# Allegro board LAY-96100_A.brd
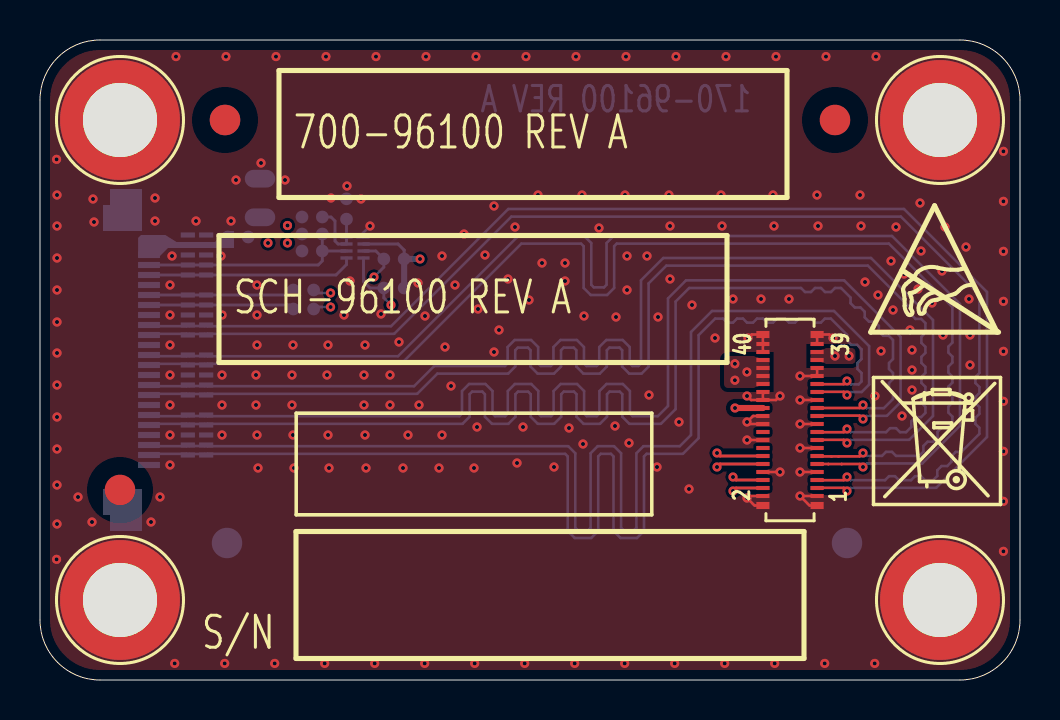
[diagram p0: board, top side]
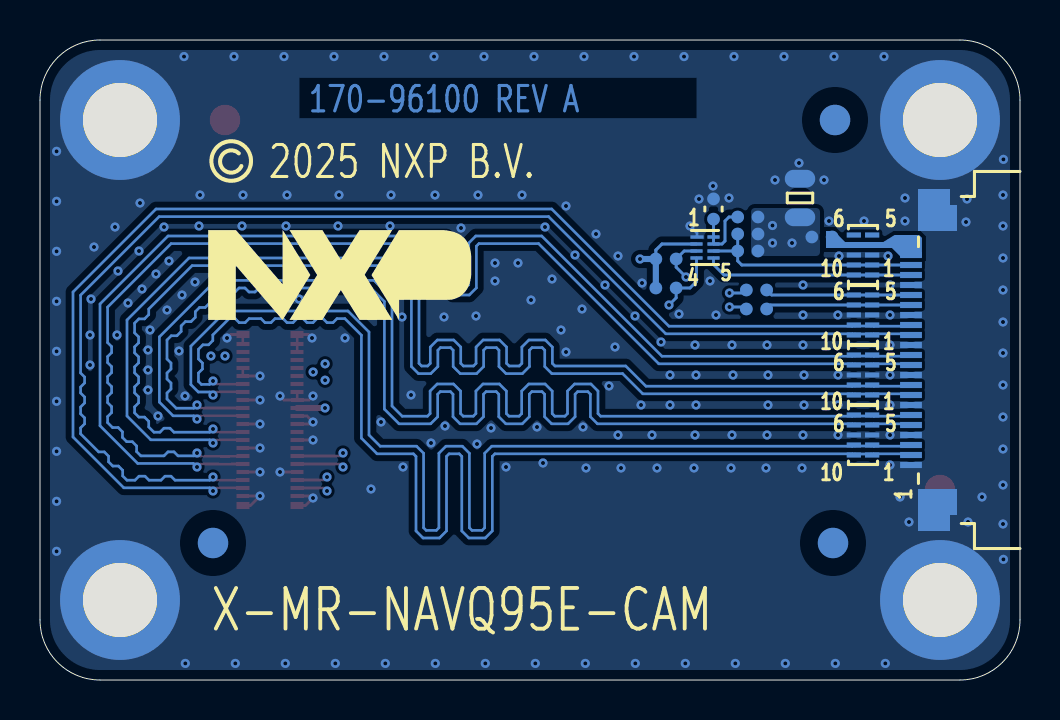
[diagram p1: board, bottom side, seen from below]

Outline 49 x 32 mm; copper layers: TOP, L2_GND1, L3_SIG1, L4_SIG2, L5_GND2, BOTTOM. Coordinates in mm from the lower left corner of the outline.
Outline path: 0,29 arc(0.88,31.12) 3,32 46,32 arc(48.12,31.12) 49,29 49,3 arc(48.12,0.88) 46,0 3,0 arc(0.88,0.88) 0,3 0,29

## Design rules (mm)
constraint set DEFAULT: min track width 0.145
net group MIPI_CSI: nets MIPI_CSI_CLK_N MIPI_CSI_D0_N MIPI_CSI_D1_N MIPI_CSI_D2_N MIPI_CSI_D3_N
net group MIPI_CSI_CLK_: nets MIPI_CSI_CLK_P
net group MIPI_CSI_D0_: nets MIPI_CSI_D0_P
net group MIPI_CSI_D1_: nets MIPI_CSI_D1_P
net group MIPI_CSI_D2_: nets MIPI_CSI_D2_P
net group MIPI_CSI_D3_: nets MIPI_CSI_D3_P
net group POWER: nets VDD_1V8 VDD_CON_3V3 VDD_SYS_3V3 VDD_SYS_5V0

## Placement (name value [footprint] x y rotation side)
BH1  MH3.7_6  [MH236-146P]  4 28 0 top
BH2  MH3.7_6  [MH236-146P]  45 28 0 top
BH3  MH3.7_6  [MH236-146P]  4 4 0 top
BH4  MH3.7_6  [MH236-146P]  45 4 0 top
C5  10uF  [CC0805_OV]  11 24.1 90 bottom
C6  0.1uF  [CC0402_25]  15.32 23.55 90 bottom
D1  IP4292CZ10-TBR  [XSON10_0P5_1P1X2P6MM]  7.85 12.25 0 bottom
D2  IP4292CZ10-TBR  [XSON10_0P5_1P1X2P6MM]  7.85 15.25 0 bottom
D3  IP4292CZ10-TBR  [XSON10_0P5_1P1X2P6MM]  7.85 18.25 0 bottom
D4  IP4292CZ10-TBR  [XSON10_0P5_1P1X2P6MM]  7.85 21.25 0 bottom
J1  CON PLUG 2X20  [CON_2X20_0P4_9P52X1P85_SM]  37.5 13 90 top
J3  CONN FPC/FFC 22  [CON_FFC_22_0P5_SM_RA_87H]  2.45 16 90 bottom
NOREF  -  []  12.8 1.08 0 top
NOREF#2  -  []  34.5 11.64 0 top
NOREF#3  -  [unnamed#2]  4 9.5 0 top
NOREF#4  -  []  6.86 4.9 0 top
NOREF#5  -  []  41.77 11.64 90 top
NOREF#6  -  [unnamed#2]  9.25 28 0 top
NOREF#7  -  []  41.67 8.78 0 top
NOREF#8  -  []  0 28.52 0 top
NOREF#9  -  [unnamed#2]  39.75 28 0 top
NOREF#10  -  []  -5.05 17.68 0 top
NOREF#11  -  []  -409.52 -356.24 0 top
NOREF#12  -  []  15.25 20.95 90 top
NOREF#13  -  []  38.52 8.14 90 top
NOREF#14  -  []  11.95 24.12 0 top
NOREF#15  -  []  159.3 -64.51 0 top
NOREF#16  -  []  0 6.75 0 top
NOREF#17  -  []  8.95 15.88 0 top
NOREF#18  -  []  15.32 21.1 90 top
NOREF#19  -  []  6.86 28.9 0 top
NOREF#20  -  []  -384.25 163.44 0 top
NOREF#21  -  []  33.23 11.64 0 top
NOREF#22  -  []  12.81 8.26 0 top
NOREF#23  -  []  5.45 10.75 90 top
NOREF#24  -  []  47.86 28.9 0 top
NOREF#25  -  []  44.84 0 90 top
NOREF#26  -  []  5.17 24.48 0 top
NOREF#27  -  []  33.23 11.64 0 top
NOREF#28  -  []  5.45 10.75 90 top
NOREF#29  -  []  4.9 8 90 top
NOREF#30  -  []  4.9 24 90 top
NOREF#31  -  []  12.12 -161.3 0 top
NOREF#32  -  []  4.9 8 90 top
NOREF#33  -  []  47.86 4.9 0 top
NOREF#34  -  []  33.7 11.64 0 top
NOREF#35  -  []  0 6.75 90 top
NOREF#36  -  []  15.25 20.95 0 top
NOREF#37  -  []  36.48 17.86 0 top
NOREF#38  -  []  12.81 8.26 0 top
NOREF#39  -  []  15.32 22.15 0 top
NOREF#40  -  []  4 4 0 top
NOREF#41  -  []  15.32 21.1 0 top
NOREF#42  -  []  39.44 25.92 180 bottom
NOREF#43  -  [unnamed#2]  9.35 6.85 180 bottom
NOREF#44  -  []  40.58 18 180 bottom
NOREF#45  -  [unnamed#2]  40.35 6.85 180 bottom
NOREF#46  -  [unnamed#2]  9.25 28 180 bottom
R5  200K  [RC0402_25]  13.61 23.15 0 bottom
R8  0 OHM  [RC0402_25]  9.9 22.15 180 bottom
R9  0 OHM  [RC0402_25]  13.18 19.5 180 bottom
R10  0 OHM  [RC0402_25]  13.18 18.55 180 bottom
R38  2.2K  [RC0402_25]  17.7 21.05 180 bottom
R39  2.2K  [RC0402_25]  17.7 19.6 180 bottom
R40  2.2K  [RC0402_25]  13.61 22.3 0 bottom
R41  2.2K  [RC0402_25]  13.61 21.45 0 bottom
U1  PCA9306JK  [X2SON8_0P35_1X1P35MM]  15.75 21.62 180 bottom

## Library data of the parts
BH1-BH4 = MOUNT_HOLE
C5 C6 = CAP_NP
D1-D4 = PUSB3F96_DFN2510A_10P
J1 = HDR_2X20_4S
J3 = CON22_2SH
R5 R8-R10 R38-R41 = RES
U1 = PCA9306_TSSOP8

## Footprints (pads in the part's own frame, mm; a bottom-side part is the same pattern mirrored in y, then rotated)
CC0402_25
  round 0.635 smd: 1(-0.508,0) 2(0.508,0)
CC0805_OV
  oval 0.889x1.524 smd: 1(-0.965,0) 2(0.965,0)
CON_2X20_0P4_9P52X1P85_SM
  rect 0.203x0.66 smd: 1(-3.8,-1.355) 2(-3.8,1.355) 3(-3.4,-1.355) 4(-3.4,1.355) 5(-3,-1.355) 6(-3,1.355) 7(-2.6,-1.355) 8(-2.6,1.355) 9(-2.2,-1.355) 10(-2.2,1.355) 11(-1.8,-1.355) 12(-1.8,1.355) 13(-1.4,-1.355) 14(-1.4,1.355) 15(-1,-1.355) 16(-1,1.355) 17(-0.6,-1.355) 18(-0.6,1.355) 19(-0.2,-1.355) 20(-0.2,1.355) 21(0.2,-1.355) 22(0.2,1.355) 23(0.6,-1.355) 24(0.6,1.355) 25(1,-1.355) 26(1,1.355) 27(1.4,-1.355) 28(1.4,1.355) 29(1.8,-1.355) 30(1.8,1.355) 31(2.2,-1.355) 32(2.2,1.355) 33(2.6,-1.355) 34(2.6,1.355) 35(3,-1.355) 36(3,1.355) 37(3.4,-1.355) 38(3.4,1.355) 39(3.8,-1.355) 40(3.8,1.355)
  rect 0.356x0.66 smd: SH1(-4.275,-1.355) SH2(-4.275,1.355) SH3(4.275,-1.355) SH4(4.275,1.355)
CON_FFC_22_0P5_SM_RA_87H
  rect 0.305x1.092 smd: 1(-5.25,3) 2(-4.75,3) 3(-4.25,3) 4(-3.75,3) 5(-3.25,3) 6(-2.75,3) 7(-2.25,3) 8(-1.75,3) 9(-1.25,3) 10(-0.75,3) 11(-0.25,3) 12(0.25,3) 13(0.75,3) 14(1.25,3) 15(1.75,3) 16(2.25,3) 17(2.75,3) 18(3.25,3) 19(3.75,3) 20(4.25,3) 21(4.75,3) 22(5.25,3)
  custom 2.1x1.95 smd: S1(-7.5,1.675) S2(7.5,1.675)
MH236-146P
  round 5.994 hole 3.708: 1(0,0)
RC0402_25
  round 0.635 smd: 1(-0.508,0) 2(0.508,0)
unnamed#2
  round 1.524 smd: (0,0)
X2SON8_0P35_1X1P35MM
  rect 0.66x0.17 smd: 1(-0.4,0.525)
  rect 0.61x0.17 smd: 2(-0.425,0.175) 3(-0.425,-0.175) 4(-0.425,-0.525) 5(0.425,-0.525) 6(0.425,-0.175) 7(0.425,0.175) 8(0.425,0.525)
XSON10_0P5_1P1X2P6MM
  rect 0.711x0.254 smd: 1(-0.457,1) 2(-0.457,0.5) 3(-0.457,0) 4(-0.457,-0.5) 5(-0.457,-1) 6(0.457,-1) 7(0.457,-0.5) 8(0.457,0) 9(0.457,0.5) 10(0.457,1)

## Nets
GND: BH1.1 BH2.1 BH3.1 BH4.1 C5.2 C6.2 D1.3 D1.8 D2.3 D2.8 D3.3 D3.8 D4.3 D4.8 J1.1 J1.2 J1.7 J1.8 J1.13 J1.16 J1.19 J1.20 J1.22 J1.25 J1.26 J1.28 J1.31 J1.33 J1.38 J1.39 J1.40 J1.SH1 J1.SH2 J1.SH3 J1.SH4 J3.1 J3.4 J3.7 J3.10 J3.13 J3.16 J3.19 J3.S1 J3.S2 U1.1
VDD_1V8: J1.24 R38.1 R39.1 U1.2
VDD_CON_3V3: D4.4 D4.7 J3.22 R8.2
VDD_SYS_3V3: C5.1 J1.30 J1.32 J1.34 J1.36 R5.1 R8.1 R40.1 R41.1
VDD_SYS_5V0: J1.35 J1.37
CAM1_IO1: J1.10 R10.1
CAM1_IO1_CON: D3.4 D3.7 J3.17 R10.2
CAM1_IO2: J1.12 R9.1
CAM1_IO2_CON: D3.5 D3.6 J3.18 R9.2
CAM_CLK_24M: J1.18
CCM_CLKO1_FLEXIO1_IO26: J1.14
I3C2B_CAM1_SCL: J1.6 R39.2 U1.4
I3C2B_CAM1_SDA: J1.4 R38.2 U1.3
MIPI_CSI_CLK_N: D2.1 D2.10(NC4) J1.17 J3.8
MIPI_CSI_CLK_P: D2.2 D2.9 J1.15 J3.9
MIPI_CSI_D0_N: D1.1 D1.10(NC4) J1.29 J3.2
MIPI_CSI_D0_P: D1.2 D1.9 J1.27 J3.3
MIPI_CSI_D1_N: D1.4 D1.7 J1.23 J3.5
MIPI_CSI_D1_P: D1.5 D1.6 J1.21 J3.6
MIPI_CSI_D2_N: D2.4 D2.7 J1.11 J3.11
MIPI_CSI_D2_P: D2.5 D2.6 J1.9 J3.12
MIPI_CSI_D3_N: D3.1 D3.10(NC4) J1.5 J3.14
MIPI_CSI_D3_P: D3.2 D3.9 J1.3 J3.15
SCL_3V3: D4.1 D4.10(NC4) J3.20 U1.5
SDA_3V3: D4.2 D4.9 J3.21 R40.2 R41.2 U1.6
N20059909: C6.1 R5.2 U1.7(VREF2) U1.8

Pads without a net: D4 5 6

## Via types
v1: diameter 0.457, hole 0.203, TOP to BOTTOM, 237 vias

## Routing (per net, layer and track width the routed paths; a pad name or vN(x,y) marks a point on that pad's centre or on a via; arc(x,y) is an arc through that point)
GND: length 17.7
  TOP w0.13: v1(38,15.2) J1.31 J1.33 ; v1(37,10.4) J1.8 ; J1.2 35.45,9.2 v1(35.35,9.1) 35.73,8.72 J1.SH2 ; J1.38 J1.40 J1.SH4 35.58,17.27 v1(35.4,17.1) ; J1.13 v1(38,11.6) ; J1.28 J1.26 ; J1.26 36.8,14 v1(37,14.2) ; J1.26 35.55,14 v1(35.35,14.2) ; v1(39.65,17.1) 39.48,17.27 J1.SH3 J1.39 ; J1.19 v1(38,12.8) ; J1.1 v1(38,9.2) 38.48,8.72 J1.SH1 ; J1.25 v1(38,14) ; J1.20 35.45,12.8 v1(35.35,12.9) 35.65,13.2 J1.22 ; J1.7 v1(38,10.4) ; J1.16 v1(35.35,12)
  BOTTOM w0.13: U1.1 16.15,22.35 v1(16.5,22.7)
  vias: v1(0.83,26.03) v1(0.83,6.03) v1(0.85,24.25) v1(0.85,22.7) v1(0.85,21.1) v1(0.85,19.5) v1(0.85,17.9) v1(0.85,16.35) v1(0.85,14.75) v1(0.85,13.15) v1(0.85,11.55) v1(0.85,9.75) v1(0.85,7.8) v1(1.9,9.15) v1(2.65,24.05) v1(2.6,7.9) v1(2.7,22.9) v1(5.55,7.9) v1(5.75,24.1) v1(5.75,22.95) v1(6,9.15) v1(6.5,19.75) v1(6.5,18.25) v1(6.5,16.75) v1(6.5,15.25) v1(6.5,13.75) v1(6.5,12.25) v1(6.5,10.75) v1(6.6,21.2) v1(6.74,0.83) v1(6.8,31.17) v1(7.8,22.95) v1(9.05,21.2) v1(9.11,18.25) v1(9.1,15.25) v1(9.1,13.75) v1(9.1,12.25) v1(9.24,0.83) v1(9.3,31.17) v1(9.55,22.95) v1(9.8,25) v1(10.85,19.75) v1(10.85,18.25) v1(10.85,16.75) v1(10.8,15.25) v1(10.8,13.75) v1(10.85,12.25) v1(10.9,10.6) v1(11.05,25.85) v1(11.74,0.83) v1(11.8,31.17) v1(12.25,25) v1(12.6,15.25) v1(12.6,13.75) v1(12.65,16.75) v1(12.65,12.25) v1(12.7,10.6) v1(14.24,0.83) v1(14.3,31.17) v1(14.35,15.25) v1(14.4,16.75) v1(14.4,12.25) v1(14.45,10.6) v1(14.55,24.1) v1(15.2,18.25) v1(15.35,24.7) v1(15.5,19.95) v1(16.05,24.05) v1(16.25,16.75) v1(16.2,15.25) v1(16.2,13.75) v1(16.25,12.25) v1(16.3,10.6) v1(16.74,0.83) v1(16.8,31.17) v1(17.05,18.3) v1(17.5,15.25) v1(17.5,13.75) v1(17.95,16.9) v1(18.15,10.6) v1(18.4,12.25) v1(18.9,19.85) v1(18.95,13.75) v1(19.25,18.2) v1(19.24,0.83) v1(19.3,31.17) v1(19.95,10.6) v1(20.1,21.2) v1(20.1,12.25) v1(20.25,16.65) v1(20.55,14.7) v1(20.75,19.75) v1(21.2,22.3) v1(21.7,10.6) v1(21.74,0.83) v1(21.8,31.17) v1(21.9,18.55) v1(21.85,12.65) v1(22.25,21.25) v1(22.7,23.7) v1(22.7,16.4) v1(22.95,17.5) v1(23.4,20.05) v1(23.75,22.65) v1(23.85,10.85) v1(24.15,12.65) v1(24.24,0.83) v1(24.3,31.17) v1(24.45,19) v1(24.9,24.25) v1(25.1,20.85) v1(25.7,10.65) v1(26.25,20.85) v1(26.25,19.95) v1(26.45,12.6) v1(26.74,0.83) v1(26.8,31.17) v1(27.1,24.25) v1(27.15,11.8) v1(27.2,18.2) v1(27.95,22.6) v1(28.8,18.15) v1(28.75,12.7) v1(29.25,24.25) v1(29.24,0.83) v1(29.3,31.17) v1(29.35,21.2) v1(29.35,19.5) v1(29.45,11.85) v1(30.35,21.2) v1(30.45,14.25) v1(30.9,18.15) v1(30.85,10.65) v1(31.45,24.25) v1(31.5,22.7) v1(31.5,20.05) v1(31.74,0.83) v1(31.8,31.17) v1(31.95,12.9) v1(32.45,9.55) v1(32.6,18.75) v1(33.75,17.1) v1(34.05,24.25) v1(34.1,22.7) v1(34.24,0.83) v1(34.3,31.17) v1(34.65,19.05) v1(36.05,19.05) v1(36.65,24.25) v1(36.7,22.7) v1(36.74,0.83) v1(36.8,31.17) v1(37.45,19.05) v1(38.85,24.25) v1(38.9,22.7) v1(39.24,0.83) v1(39.3,31.17) v1(41,24.25) v1(41.05,22.7) v1(41.25,19.9) v1(41.75,14.2) v1(41.74,0.83) v1(41.8,31.17) v1(41.9,19.25) v1(42.05,16.45) v1(42.55,20.95) v1(42.65,18.5) v1(42.8,22.65) v1(43.1,13.2) v1(43.2,20.3) v1(43.5,17.5) v1(43.6,16.5) v1(43.6,15.5) v1(43.6,14.5) v1(43.9,19.55) v1(44,23.85) v1(44.05,21.45) v1(44.6,18.85) v1(45.1,20.45) v1(45.15,17.25) v1(45.25,22.65) v1(46.3,21.65) v1(46.45,19.05) v1(46.5,17.25) v1(46.5,15.75) v1(48.17,26.43) v1(48.17,23.93) v1(48.17,21.43) v1(48.17,18.93) v1(48.17,16.43) v1(48.17,13.93) v1(48.17,11.43) v1(48.17,8.93) v1(48.17,6.43)
VDD_1V8: length 26.2
  TOP w0.305: v1(34.75,13.6) J1.24
  L4_SIG2 w0.5: v1(34.75,13.6) 24.53,13.6 20,18.13 20,20.05 v1(19,21.05)
  BOTTOM w0.152: R38.1 18.21,21.5 17.9,21.8 U1.2
  BOTTOM w0.305: v1(19,21.05) R38.1 R39.1
VDD_SYS_3V3:
  vias: v1(11.4,21.85) v1(12.38,22.73) v1(12.38,21.85) v1(34.75,15.81) v1(34.75,14.99) v1(35.34,15.4)
VDD_SYS_5V0: length 0.7
  L4_SIG2 w0.5: v1(39.75,16.2) v1(40.45,16.2)
CAM1_IO1: length 27.4
  TOP w0.145: v1(33.85,10.65) 34,10.8 J1.10
  L3_SIG1 w0.135: v1(14.53,18.65) 14.53,17.62 18.25,13.9 18.25,13.15 21.35,10.05 33.25,10.05 v1(33.85,10.65)
  BOTTOM w0.145: v1(14.53,18.65) 13.78,18.65 R10.1
CAM1_IO1_CON: length 7.3
  BOTTOM w0.145: J3.17 D3.4 D3.7 12.47,18.75 R10.2
CAM1_IO2: length 25.9
  TOP w0.145: v1(33.85,11.35) 34,11.2 J1.12
  L3_SIG1 w0.135: v1(33.85,11.35) 24.7,11.35 18.4,17.65 16.85,17.65 15.15,19.35 v1(14.53,19.35)
  BOTTOM w0.145: R9.1 13.83,19.35 v1(14.53,19.35)
CAM1_IO2_CON: length 7.3
  BOTTOM w0.145: R9.2 12.42,19.25 D3.6 D3.5 J3.18
I3C2B_CAM1_SCL: length 25.7
  TOP w0.145: v1(34.65,10.15) 34.8,10 J1.6
  L4_SIG2 w0.135: v1(34.65,10.15) 27.5,10.15 26.45,11.2 24.75,11.2 17.55,18.4 v1(17.55,18.75)
  BOTTOM w0.145: v1(17.55,18.75) 17.19,19.11 R39.2 16.5,19.6 16.18,19.93 U1.4
I3C2B_CAM1_SDA: length 28.7
  TOP w0.145: v1(34.65,9.45) 34.8,9.6 J1.4
  L4_SIG2 w0.135: v1(16.7,20.15) 16.35,19.8 16.35,17.5 24.9,8.95 34.15,8.95 v1(34.65,9.45)
  BOTTOM w0.145: U1.3 16.79,21.45 R38.2 17.19,20.64 v1(16.7,20.15)
MIPI_CSI_CLK_N: length 62.9
  TOP w0.13: v1(40.35,12.55) 40.19,12.39 38.87,12.39 J1.17
  BOTTOM w0.13: v1(40.35,12.55) 40.51,12.39 42.3,12.39 42.5,12.59 42.8,12.59 43,12.39 43.3,12.39 43.56,12.65 43.56,12.93 43.77,13.15 44.06,13.15 44.27,13.36 44.27,13.66 44.07,13.86 44.07,14.16 44.27,14.36 44.27,14.66 44.07,14.86 44.07,15.16 44.27,15.36 44.27,15.66 44.07,15.86 44.07,16.16 44.27,16.36 44.27,16.66 44.07,16.86 44.07,17.16 44.27,17.36 44.27,17.84 44.06,18.05 43.77,18.05 43.56,18.27 43.56,18.55 41.39,20.72 31.32,20.72 30.43,19.83 30.43,15.67 30.08,15.32 29.46,15.32 29.11,15.67 29.11,16.49 28.98,16.62 28.47,16.62 28.34,16.49 28.34,15.67 27.99,15.32 27.17,15.32 26.82,15.67 26.82,16.49 26.69,16.62 26.18,16.62 26.05,16.49 26.05,15.67 25.7,15.32 24.88,15.32 24.53,15.67 24.53,16.49 24.4,16.62 23.89,16.62 23.76,16.49 23.76,15.67 23.41,15.32 19.87,15.32 18.86,14.31 8.37,14.31 D2.10 8.26,14.3 7.44,14.3 D2.1 7.33,14.31 5.51,14.31 J3.8
MIPI_CSI_CLK_P: length 63
  TOP w0.13: J1.15 38.87,12.01 40.19,12.01 v1(40.35,11.85)
  BOTTOM w0.13: J3.9 5.51,14.69 7.33,14.69 D2.2 7.44,14.7 8.26,14.7 D2.9 8.37,14.69 18.7,14.69 19.71,15.7 23.25,15.7 23.38,15.83 23.38,16.65 23.73,17 24.55,17 24.91,16.65 24.91,15.83 25.04,15.7 25.54,15.7 25.67,15.83 25.67,16.65 26.02,17 26.84,17 27.2,16.65 27.2,15.83 27.33,15.7 27.83,15.7 27.96,15.83 27.96,16.65 28.31,17 29.13,17 29.49,16.65 29.49,15.83 29.62,15.7 29.92,15.7 30.05,15.83 30.05,19.99 31.16,21.1 41.55,21.1 44.65,18 44.65,13.2 43.46,12.01 40.51,12.01 v1(40.35,11.85)
MIPI_CSI_D0_N: length 63.1
  TOP w0.13: v1(40.35,14.95) 40.19,14.79 38.87,14.79 J1.29
  BOTTOM w0.13: v1(40.35,14.95) 40.52,14.78 40.93,14.78 41.08,14.93 41.08,15.35 40.88,15.55 40.88,15.85 41.08,16.05 41.08,16.54 40.85,16.76 40.57,16.76 40.36,16.97 40.36,17.25 39.54,18.07 39.24,18.07 39.04,17.87 38.74,17.87 38.54,18.07 37.95,18.07 37.75,17.87 37.45,17.87 37.25,18.07 36.85,18.07 36.65,17.87 36.35,17.87 36.15,18.07 35.85,18.07 35.65,17.87 35.35,17.87 35.15,18.07 34.85,18.07 34.65,17.87 34.35,17.87 34.15,18.07 33.76,18.07 32.93,17.24 32.93,12.09 32.15,11.31 30.33,11.31 30.2,11.18 30.2,7.45 29.85,7.1 29.03,7.1 28.68,7.45 28.68,11.18 28.55,11.31 28.04,11.31 27.91,11.18 27.91,7.45 27.56,7.1 26.74,7.1 26.39,7.45 26.39,11.18 26.26,11.31 8.37,11.31 D1.10 8.26,11.3 7.44,11.3 D1.1 7.33,11.31 5.51,11.31 J3.2
MIPI_CSI_D0_P: length 63.2
  TOP w0.13: v1(40.35,14.25) 40.19,14.41 38.87,14.41 J1.27
  BOTTOM w0.13: v1(40.35,14.25) 40.5,14.4 41.09,14.4 41.46,14.77 41.46,16.69 39.7,18.45 33.6,18.45 32.55,17.4 32.55,12.25 31.99,11.69 30.17,11.69 29.82,11.34 29.82,7.61 29.69,7.48 29.19,7.48 29.06,7.61 29.06,11.34 28.7,11.69 27.88,11.69 27.53,11.34 27.53,7.61 27.4,7.48 26.9,7.48 26.77,7.61 26.77,11.34 26.41,11.69 8.37,11.69 D1.9 8.26,11.7 7.44,11.7 D1.2 7.33,11.69 5.51,11.69 J3.3
MIPI_CSI_D1_N: length 63.2
  TOP w0.13: v1(41.15,13.75) 41,13.6 J1.23
  BOTTOM w0.13: v1(41.15,13.75) 41.31,13.59 42.19,13.59 42.65,14.05 42.65,14.35 42.45,14.55 42.45,14.85 42.65,15.05 42.65,15.35 42.45,15.55 42.45,15.85 42.65,16.05 42.65,17 42.44,17.21 42.16,17.21 41.94,17.42 41.94,17.71 41.73,17.92 41.45,17.92 41.24,18.13 41.24,18.41 41.02,18.63 40.74,18.63 40.53,18.84 40.53,19.12 40.05,19.6 39.75,19.6 39.55,19.4 39.25,19.4 39.05,19.6 38.75,19.6 38.55,19.4 38.25,19.4 38.05,19.6 32.46,19.6 31.78,18.92 31.78,13.54 31.05,12.81 29.47,12.81 29.12,13.16 29.12,14.29 28.99,14.42 28.48,14.42 28.35,14.29 28.35,13.16 28,12.81 27.18,12.81 26.83,13.16 26.83,14.29 26.7,14.42 26.19,14.42 26.06,14.29 26.06,13.16 25.71,12.81 24.89,12.81 24.54,13.16 24.54,14.29 24.41,14.42 23.9,14.42 23.77,14.29 23.77,13.16 23.42,12.81 22.6,12.81 22.25,13.16 22.25,14.29 22.12,14.42 21.61,14.42 21.48,14.29 21.48,13.16 21.13,12.81 8.37,12.81 D1.7 8.26,12.8 7.44,12.8 D1.4 7.33,12.81 5.51,12.81 J3.5
MIPI_CSI_D1_P: length 63.3
  TOP w0.13: v1(41.15,13.05) 40.98,13.22 38.88,13.22 J1.21
  BOTTOM w0.13: J3.6 5.51,13.19 7.33,13.19 D1.5 7.44,13.2 8.26,13.2 D1.6 8.37,13.19 20.97,13.19 21.1,13.32 21.1,14.45 21.45,14.8 22.27,14.8 22.63,14.45 22.63,13.32 22.76,13.19 23.26,13.19 23.39,13.32 23.39,14.45 23.74,14.8 24.56,14.8 24.92,14.45 24.92,13.32 25.05,13.19 25.55,13.19 25.68,13.32 25.68,14.45 26.03,14.8 26.85,14.8 27.21,14.45 27.21,13.32 27.34,13.19 27.84,13.19 27.97,13.32 27.97,14.45 28.32,14.8 29.14,14.8 29.5,14.45 29.5,13.32 29.63,13.19 30.89,13.19 31.4,13.7 31.4,19.08 32.3,19.98 40.21,19.98 43.03,17.16 43.03,13.89 42.35,13.21 41.31,13.21 v1(41.15,13.05)
MIPI_CSI_D2_N: length 63.2
  TOP w0.13: v1(41.15,11.35) 40.98,11.18 39.92,11.18 38.88,11.18 J1.11
  BOTTOM w0.13: v1(41.15,11.35) 41.29,11.21 42.1,11.21 42.3,11.41 42.6,11.41 42.8,11.21 43.96,11.21 44.17,11.42 44.17,11.7 44.38,11.91 44.66,11.91 44.88,12.13 44.88,12.41 45.09,12.62 45.37,12.62 45.62,12.87 45.62,13.17 45.42,13.37 45.42,13.67 45.62,13.87 45.62,14.17 45.42,14.37 45.42,14.67 45.62,14.87 45.62,15.17 45.42,15.37 45.42,15.67 45.62,15.87 45.62,16.17 45.42,16.37 45.42,16.67 45.62,16.87 45.62,18.64 42.44,21.82 28.84,21.82 28.71,21.69 28.71,19.6 28.36,19.25 27.54,19.25 27.18,19.6 27.18,21.69 27.05,21.82 24.07,21.82 18.06,15.81 8.37,15.81 D2.7 8.26,15.8 7.44,15.8 D2.4 7.33,15.81 5.51,15.81 J3.11
MIPI_CSI_D2_P: length 63.3
  TOP w0.13: v1(41.15,10.65) 41,10.8 40.08,10.8 J1.9
  BOTTOM w0.13: J3.12 5.51,16.19 7.33,16.19 D2.5 7.44,16.2 8.26,16.2 D2.6 8.37,16.19 17.9,16.19 23.91,22.2 27.21,22.2 27.56,21.85 27.56,19.76 27.69,19.63 28.2,19.63 28.33,19.76 28.33,21.85 28.68,22.2 42.6,22.2 46,18.8 46,12.71 44.11,10.83 41.33,10.83 v1(41.15,10.65)
MIPI_CSI_D3_N: length 63
  TOP w0.13: v1(40.35,10.15) 40.19,9.99 38.87,9.99 J1.5
  BOTTOM w0.13: v1(40.35,10.15) 40.51,9.99 42.25,9.99 42.45,10.19 42.75,10.19 42.95,9.99 43.55,9.99 43.75,10.19 44.05,10.19 44.25,9.99 44.65,9.99 44.86,10.2 44.86,10.48 45.08,10.7 45.36,10.7 45.57,10.91 45.57,11.19 45.78,11.4 46.07,11.4 46.97,12.31 46.97,12.61 46.77,12.81 46.77,13.11 46.97,13.31 46.97,13.65 46.77,13.85 46.77,14.15 46.97,14.35 46.97,14.65 46.77,14.85 46.77,15.15 46.97,15.35 46.97,19.24 43.04,23.17 23.57,23.17 17.71,17.31 8.37,17.31 D3.10 8.26,17.3 7.44,17.3 D3.1 7.33,17.31 5.51,17.31 J3.14
MIPI_CSI_D3_P: length 63.1
  TOP w0.13: v1(40.35,9.45) 40.19,9.61 38.87,9.61 J1.3
  BOTTOM w0.13: v1(40.35,9.45) 40.51,9.61 44.81,9.61 47.35,12.15 47.35,19.4 43.2,23.55 23.41,23.55 17.55,17.69 8.37,17.69 D3.9 8.26,17.7 7.44,17.7 D3.2 7.33,17.69 5.51,17.69 J3.15
SCL_3V3: length 10.4
  BOTTOM w0.145: U1.5 15.32,20.77 14.8,20.25 D4.10 D4.1 J3.20
SDA_3V3: length 11.3
  BOTTOM w0.145: R41.2 U1.6 ; R41.2 14.12,20.95 13.91,20.75 D4.9 D4.2 J3.21 ; R41.2 R40.2
N20059909: length 3.6
  BOTTOM w0.145: C6.1 U1.8 U1.7 14.9,21.8 14.75,21.95 14.75,22.95 14.55,23.15 R5.2

## Copper pours and planes (outline as drawn; the poured copper is in the pictures)
GND on TOP, L3_SIG1: 48.5,3 47.77,1.23 46,0.5 3,0.5 1.23,1.23 0.5,3 0.5,29 1.23,30.77 3,31.5 46,31.5 47.77,30.77 48.5,29
GND on BOTTOM: 48.5,3 47.77,1.23 46,0.5 3,0.5 1.23,1.23 0.5,3 0.5,29 1.23,30.77 3,31.5 46,31.5 47.77,30.77 48.5,29 ; 27 cut-outs
GND on L2_GND1, L5_GND2: 48.5,3 47.77,1.23 46,0.5 3,0.5 1.23,1.23 0.5,3 0.5,29 1.23,30.77 3,31.5 46,31.5 47.77,30.77 48.5,29 ; 1 cut-out
GND on L4_SIG2: 48.5,3 47.77,1.23 46,0.5 3,0.5 1.23,1.23 0.5,3 0.5,29 1.23,30.77 3,31.5 46,31.5 47.77,30.77 48.5,29 ; 1 cut-out
VDD_CON_3V3 on BOTTOM (solid shape): 9.7,21.6 6.4,21.6 6,21.2 5.99,21.15 4.9,21.15 4.9,22.1 5.05,22.25 6.26,22.25 6.83,21.9 8.75,21.9 9.3,22.45 9.7,22.45
VDD_SYS_3V3 on BOTTOM: 10.2,23.6 10.06,23.54 10,23.4 10,21.4 10.06,21.26 10.2,21.2 13.25,21.2 13.39,21.26 13.45,21.4 13.45,23.4 13.39,23.54 13.25,23.6
VDD_SYS_3V3 on L3_SIG1: 10.43,23.38 10.43,20.82 10.78,20.48 19.12,20.48 25,14.6 36,14.6 36.23,14.82 36.23,16.93 36,17.15 27.18,17.15 20.68,23.65 10.7,23.65
VDD_SYS_3V3 on TOP: 36.48,16.2 36.48,14.6 34.4,14.6 34.26,14.66 34.2,14.8 34.2,16 34.26,16.14 34.4,16.2
VDD_SYS_5V0 on TOP: 38.52,16.6 38.52,15.8 40.58,15.8 40.72,15.86 40.77,16 40.77,16.4 40.72,16.54 40.58,16.6

## Text on the board
BOTTOM: 170-96100 REV A | 09 | L6_SS
Board Geometry/Soldermask Bottom: 11 | SECONDARY SOLDERMASK
Ref Des/Silkscreen Bottom: 10 | SECONDARY SILKSCREEN | X-MR-NAVQ95E-CAM
User.Comments: 1 OF 1 | TEST PROBE | 1/1 | 1
TOP: 04 | L1_PS
Board Geometry/Soldermask Top: 02 | PRIMARY SOLDERMASK
Ref Des/Silkscreen Top: 03 | PRIMARY SILKSCREEN
L2_GND1: 05 | L2_GND1
L3_SIG1: 06 | L3_SIG1
L4_SIG2: 07 | L4_SIG2
L5_GND2: 08 | L5_GND2
XSECTION_CHART: *  SURFACE - AIR 0 MM | *  DIELECTRIC - SOLDERMASK 0.02 MM | L1 TOP CONDUCTOR - COPPER 0.04 MM | *  DIELECTRIC - ISOLA PCL370HR 0.088 MM | L2 L2_GND1 PLANE - COPPER 0.016 MM | *  DIELECTRIC - ISOLA PCL370HR 0.1 MM | L3 L3_SIG1 CONDUCTOR - COPPER 0.016 MM | *  DIELECTRIC - ISOLA PCL370HR 0.996 MM | L4 L4_SIG2 CONDUCTOR - COPPER 0.016 MM | L5 L5_GND2 PLANE - COPPER 0.016 MM | L6 BOTTOM CONDUCTOR - COPPER 0.04 MM | DESIGN CROSS SECTION CHART | ___________________________ | TOTAL THICKNESS 1.556 MM | 1-6
DIMENSION: LAYERS | L1_PS | L3_SIG1 | L4_SIG2 | L6_SS | TRACE WIDTH | 0.145 | 0.135 | SE | IMPEDANCE | 50.00 | N/A | 0.130 | TRACE SPACING | 0.25 | DIFF | 100.00 | REFERENCE LAYER | 2 | 5 | SCALE: NONE | BOARD THICKNESS TOLERANCE +/-10% | 21. THE MANUFACTURE HAS THE OPTION TO ADD COPPER THIEVING ON OUTER AND INNER LAYERS, | 1. THIS DRAWING SPECIFIES THE REQUIREMENTS FOR A PRINTED WIRING BOARD IN ACCORDANCE. | WITH SPECIFICATION IPC-6012 CLASS 2 (LATEST REVISION). | 2. THE PWB MUST BE LEAD FREE ASSEMBLY PROCESS COMPATIBLE AND MUST BE ABLE TO HANDLE | A MINIMUM OF 5 CYCLES AT 260 DEGREES CELSIUS FOR 10 SECONDS. | 3. BASE MATERIAL - LAMINATE AND PREPREG SHALL MEET IPC-4101B-26, 83 or 98 | 4. COPPER FOIL WEIGHT - SEE STACKUP DETAIL 'A' | 5. CHARACTERISTIC IMPEDANCE - SEE DETAIL 'B' | 6. MINIMUM CONDUCTIVE WIDTH/SPACING TO BE 0.13mm/0.127mm | 7. PLATING FINISH -A. BOTH SIDES ENIG TO MEET THE REQUIREMENTS OF IPC-4552 (LATEST REVISION). | 10. SILKSCREEN - WHITE EPOXY OR ACRYLIC INK, BOTH SIDES. NO SILKSCREEN ON ANY EXPOSED COPPER FEATURE. | 12. PRINTED WIRING BOARD IS TO BE INDIVIDUALLY BAGGED. | 13. DFM CHECK MUST BE RUN ON BOARD DATA BEFORE BUILDING BOARDS, | UNLESS PRIOR APPROVAL IS GIVEN IN WRITING BY NXP. | 14. TEARDROPS MAYBE ADDED AT THE FAB HOUSE TO ALL SIGNAL LAYERS. | 15. TWO SOLDER SAMPLES TO BE PROVIDED. | 16. SUPPLIER MARKINGS - ON SOLDER SIDE ONLY, WHERE SHOWN. | 17. THE PWB WILL BE MARKED AS LEAD FREE BY USE OF AN INK STAMP Pb | 18. THE PWB WILL BE MARKED AS LEAD FREE PROCESS COMPATIBLE BY USE OF AN INK STAMP 260 C | 20. FINISHED PCB MUST BE PANELIZED FOR ASSEMBLY ACCORDING TO CONTRACT MANUFACTURERS REQUIREMENTS. | 9. SOLDERMASK - TO MEET THE REQUIREMENTS OF IPC-SM-840E (OR LATEST REVISION). | 8. FAB VENDOR IS NOT ALLOWED TO USE ODB FOR FABRICATION. CAN BE USED ONLY FOR REFERENCE. | THE ADDITION OF RAILS AND .125"NON-PLATED TOOLING HOLES ARE AT THE DISCRETION OF | CONTRACT MANUFACTURER.PANELIZATION MUST BE APPROVED BY CONTRACT MANUFACTURER. | KEEP A MINIMUM DISTANCE OF .100" FROM ANY BOARD FEATURES. | GREEN COLOR, BOTH SIDES. MODIFICATION OF SOLDERMASK IS NOT ALLOWED WITHOUT WRITTEN PERMISSION FROM NXP. | TYPE: LPI OR EQUIVALENT. | Tg - MUST BE GREATER THAN OR EQUAL TO 180 DEGREES CELSIUS. | Td - MUST BE GREATER THAN OR EQUAL TO 340 DEGREES CELSIUS. | - MUST BE UL RECOGNIZED AND MUST HAVE AN ID THAT CONFORMS TO UL94V-0 | B. DIAMETER OR SIZE = +/- .002 OF ORIGINAL DATA | A. LOCATION = +/-.002" OF PLATED PADS. | 19. A. ALL PLATED AND NON-PLATED THROUGH HOLES ARE TO BE DRILLED AT PRIMARY DRILL STEP, EXCEPT AS NOTED | IN NOTE 20B. THESE HOLE LOCATION TOLERANCES ARE TO BE +/-.002 IN REFERENCE TO THE PRIMARY DATUM. | 19 | 16 | DETAIL | IMPEDANCE REQUIREMENTS | IMPEDANCE TOLERANCE IS 10% | LAYER STACKUP | PRIMARY DATUM | GRID ORIGIN | B | A
PASTEMASK_TOP: 01 | PASTEMASK TOP
User.5: 12 | SECONDARY PASTEMASK
User.20: 1 | 2 | 49 | 50 | 04 | 13 | L10_SS | L1_PS
User.21: 1 | 5 | 20 | 6 | 10 | 16 | 15 | 11 | AK | A | E | 52 | C | 3 | 40 | 31 | 30 | 21 | P10 | P12 | P9 | 4 | P1 | P2 | P14 | 2 | P | 14 | 49 | 50 | 9 | 13 | 12 | CARD PUSH STROKE | CARD SET POSITION | CARD EJECT STROKE | 8 | 19 | 7 | C3 | CD | AA | 42 | 29 | 43 | 28 | 56 | 17 | 24 | 25 | 32 | 58 | 68 | 74 | 57 | 67 | 75 | PCB EDGE SIDE | PCB EDGE DIRECTION | BOARD EDGE NOT DEFINED | BY MANUFACTURER | ON | PUSH STROKE POSITION | CARD LOCK POSITION | CARD EJECT POSITION | +
User.22: 50 | 2 | 1 | 49
User.23: 9 | 13 | 1 | A | C | 5 | 3 | E | 16 | 28 | 43 | 74 | 75 | 21 | 20 | 11 | 10 | 2 | 12 | 14 | 8 | 4 | 7 | 39 | 40 | B12 | A1 | A12 | B1 | 24 | 6 | 25 | 36 | 48 | 37 | 50 | 49 | PCB EDGE SIDE | PCB EDGE | EDGE NOT DEFINED BY MANUFACTURER | PCB EDGE DIRECTION BOARD | L10_SS | 170-95869 REV A
User.24: 40 | 2 | 39 | 1
User.25: 9 | 13 | 1 | A | C | 5 | 3 | E | 16 | 28 | 43 | 74 | 75 | 21 | 20 | 11 | 10 | 2 | 12 | 14 | 8 | 4 | 7 | 39 | 40 | B12 | A1 | A12 | B1 | 24 | 6 | 25 | 36 | 48 | 37 | 50 | 49 | PCB EDGE SIDE | PCB EDGE | EDGE NOT DEFINED BY MANUFACTURER | PCB EDGE DIRECTION BOARD | L10_SS | 170-95869 REV A
User.27: OF 12
User.30: 22. THIS FAB_VIAFILL.ART SHOWS LOCATIONS OF VIA-IN-PAD TO BE FILLED. | 1/1 | 2 | 3
User.31: 24. | 1/1 | 3 | CAD DESIGNER: DELETE THIS FAB PAGE IF BACKDRILL IS NOT USED ON THIS DESIGN. | FAB SUPPLIER: DISREGARD THIS PAGE IF BACKDRILL REQUIRMENT IS NOT PROVIDED.
User.45: TOP TO LAYER X | BACK DRILL REFERENCE | BOTTOM TO LAYER X | LAYER X | MUST CUT LAYER | LAYER X+1 | MUST NOT CUT LAYER | LAYER X-1 | FIGURE | FINISHED_SIZE | 0.2032 | 3.7084 | DRILL CHART: TOP to BOTTOM | ALL UNITS ARE IN MILLIMETERS | TOLERANCE_DRILL | +0.0/-0.2032 | +0.0762/-0.0762 | PLATED | QTY | 237 | 4 | 241 | TOTAL HOLES:
